# Altium PCB Motor_Driver.PcbDoc
Units mil, origin at the board's own origin, x right, y up, seen from the top; angles counter-clockwise.
Board outline 3935 x 2365 mil, 2 copper layers (Top Layer, Bottom Layer); 65 components, 50 nets, 262 pads, 52 vias.
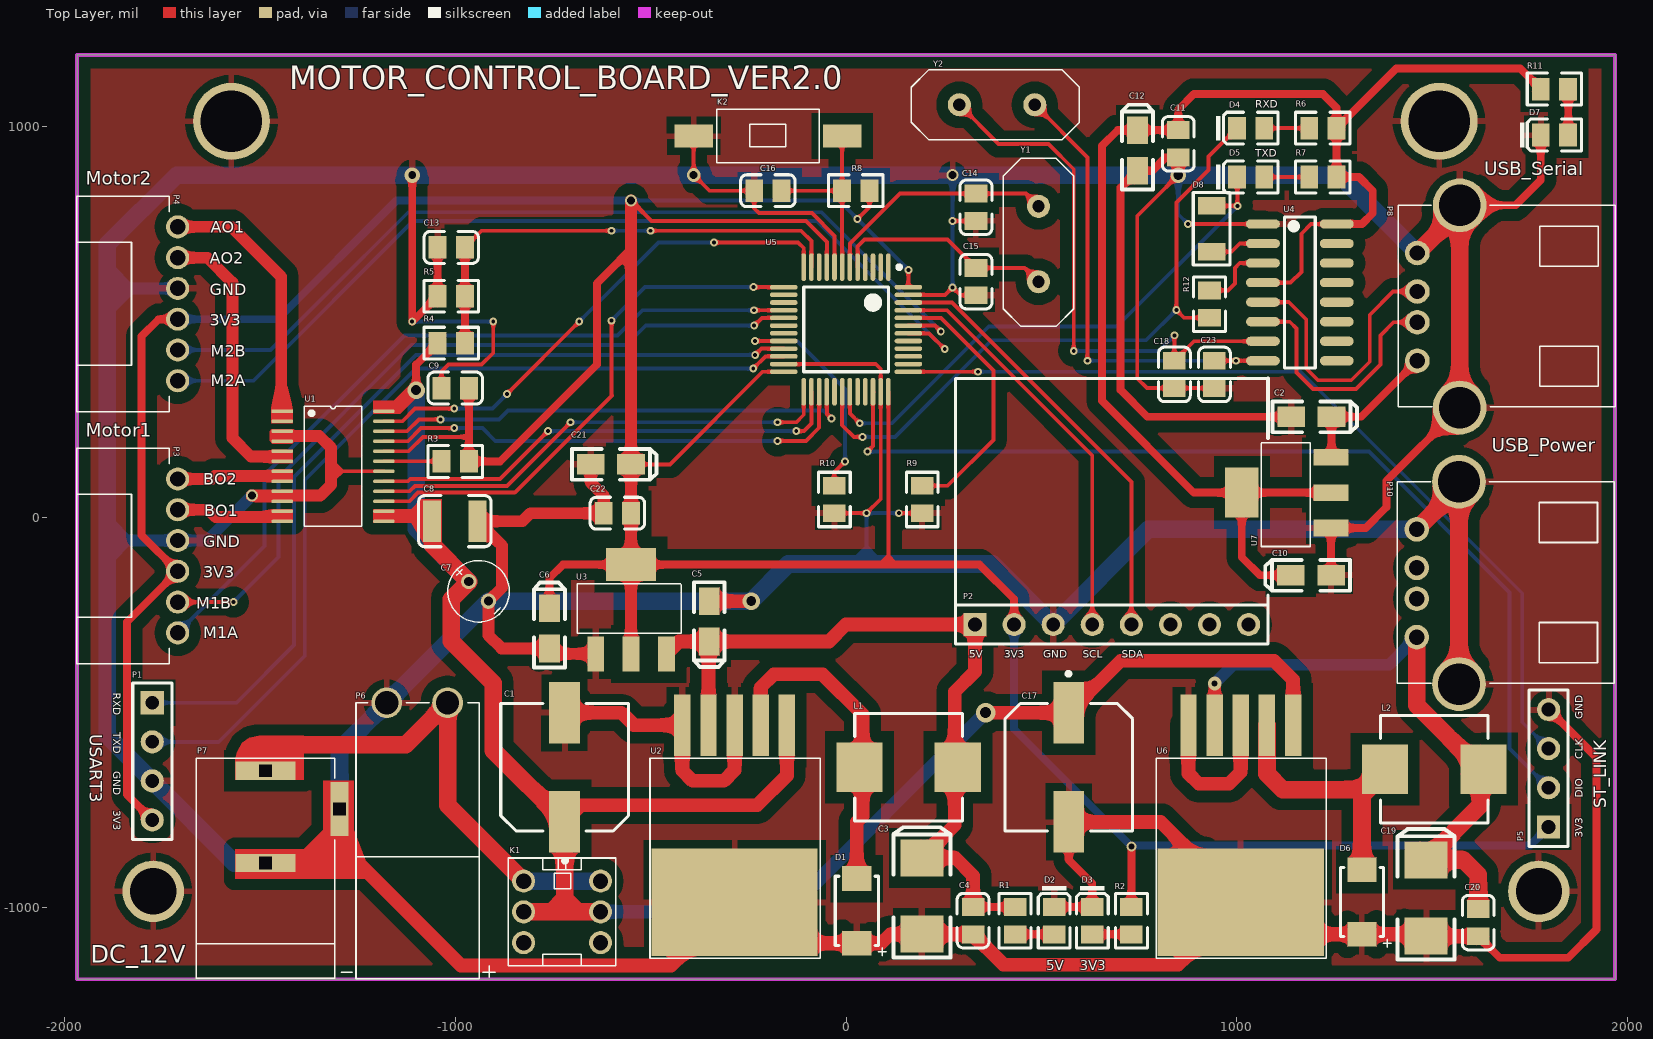
[diagram p0: Top Layer view]
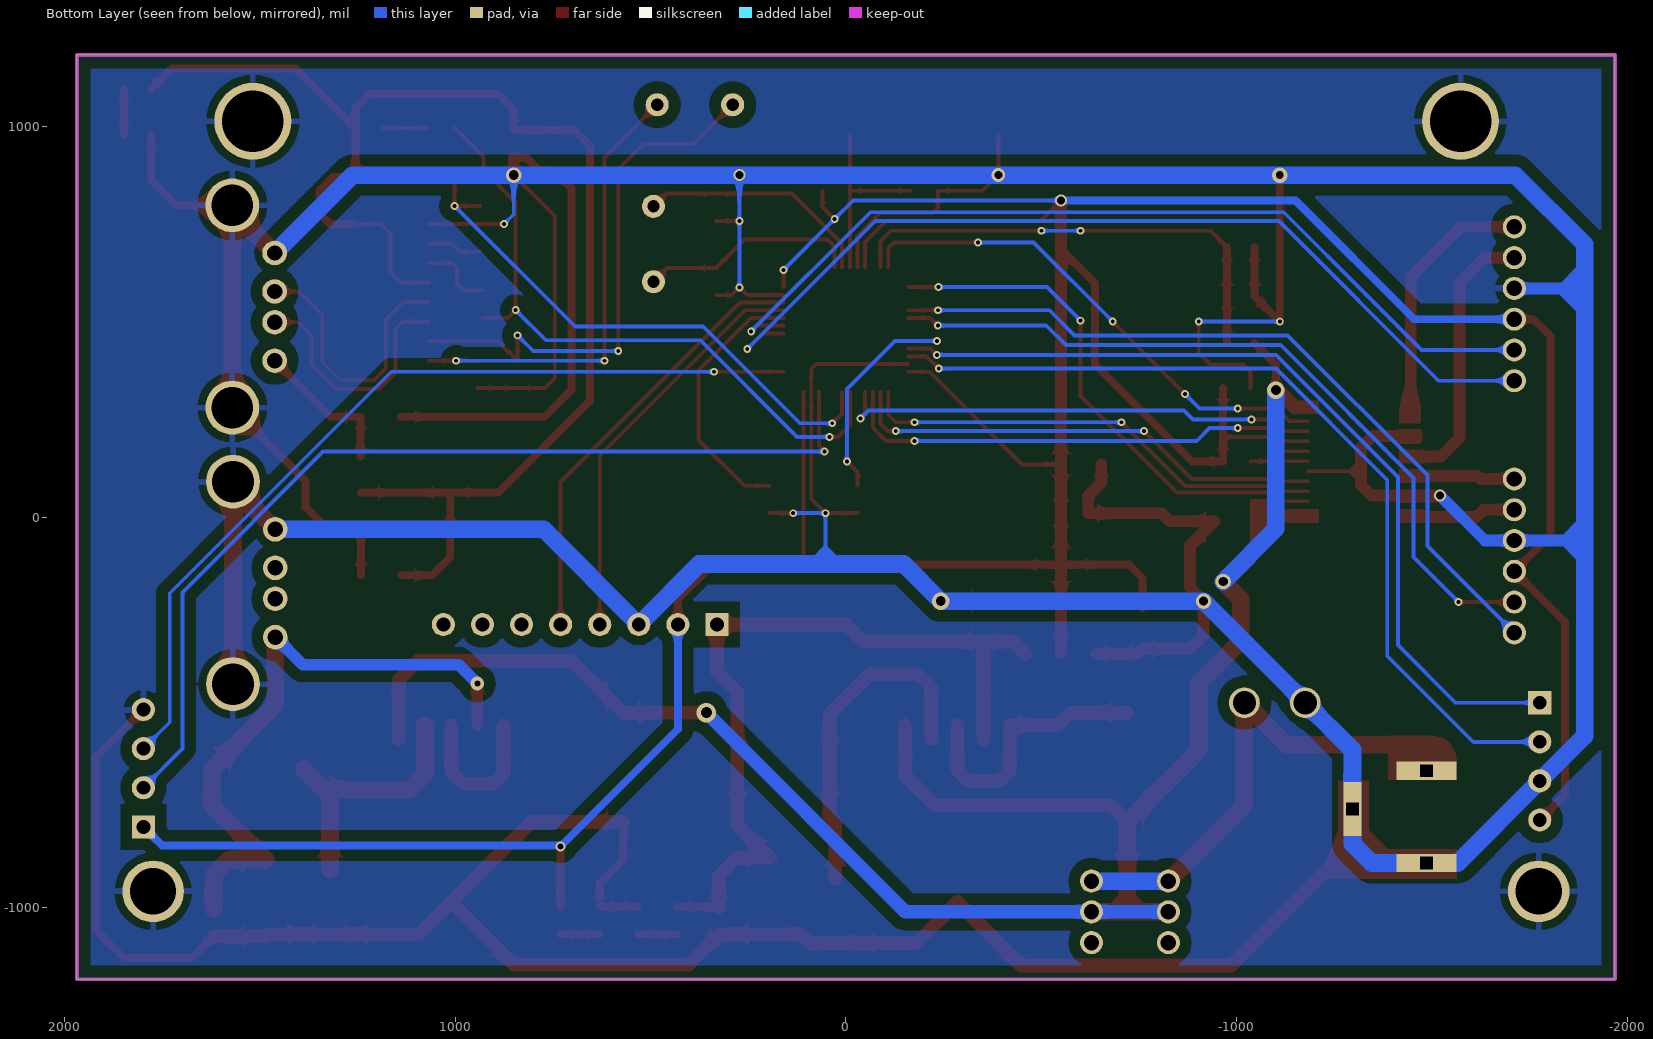
[diagram p1: Bottom Layer view, seen from below]
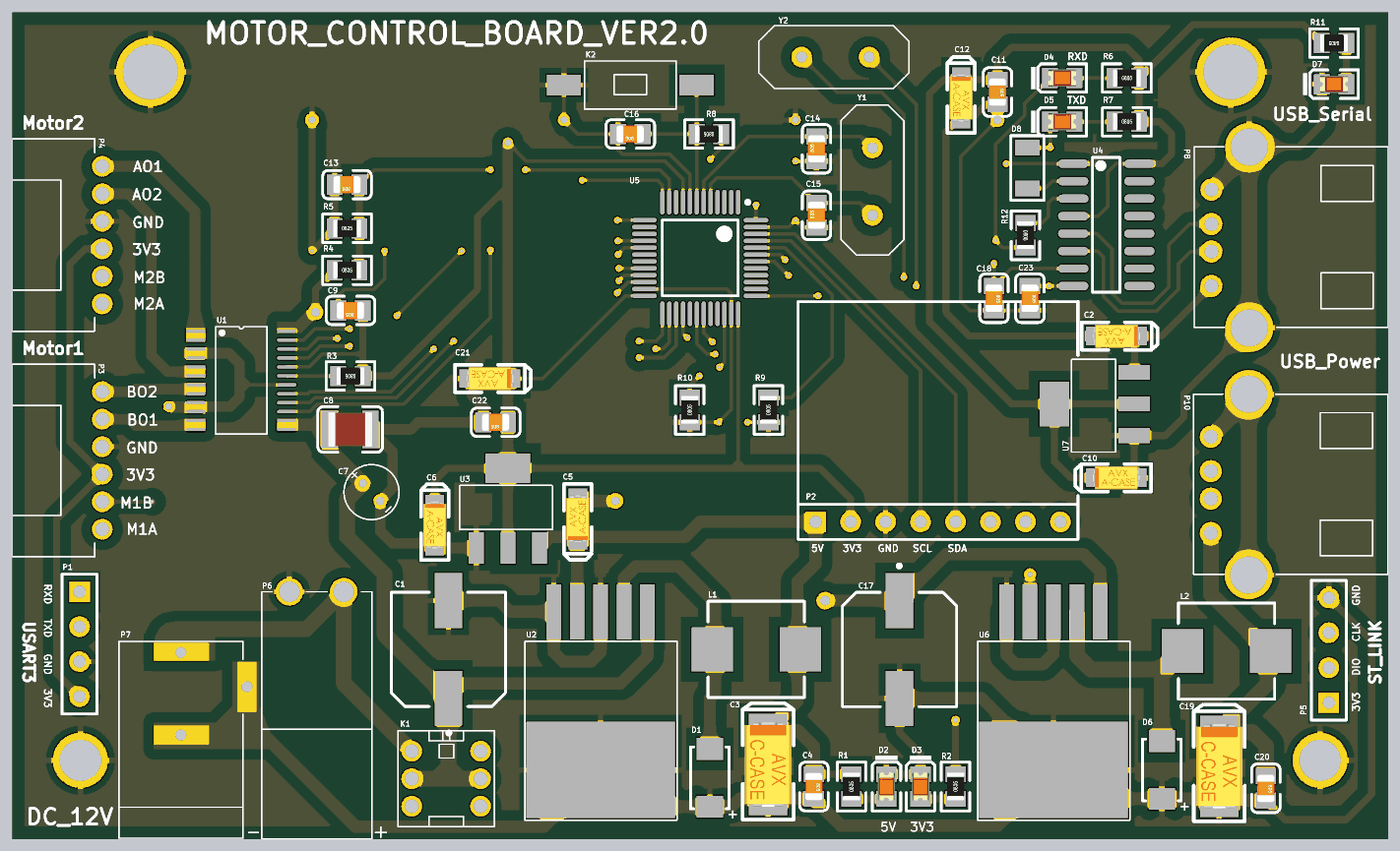
[diagram p2: 3D render of the assembled board from above, using the file's embedded part models]

## Layer stack, top to bottom
Top Solder: solder mask 0.4, Solder Resist, Dk 3.5
Top Layer: signal copper 1.4
Dielectric 1: dielectric 12.6, FR-4, Dk 4.8
Bottom Layer: signal copper 1.4
Bottom Solder: solder mask 0.4, Solder Resist, Dk 3.5

## Board outline
-1967.5,-1182.5 -1967.5,1182.5 1967.5,1182.5 1967.5,-1182.5

## Design rules (kind name [scope] priority, off if disabled: settings)
Clearance Polygon [InPolygon] p1: gap=30
Clearance [All] p2: gap=6
HoleSize [All] p1: absolutevalues=TRUE maxlimit=200 minlimit=1 maxpercent=80.000 minpercent=20.000
MinimumSolderMaskSliver [All] p1: minsoldermaskwidth=5
PolygonConnect [All] p1: connectstyle=Relief reliefconductorwidth=15 reliefentries=4 polygonreliefangle="90 Angle" airgapwidth=20
RoutingVias [All] p1: holewidth=10 width=20 viastyle="Through Hole" minholewidth=10 minwidth=20 maxholewidth=160 maxwidth=200
SilkToSilkClearance [All] p1: silktosilkclearance=2
SilkToSolderMaskClearance [IsPad] p1: minsilkscreentomaskgap=0 clearancetoexposedcopper=TRUE
SolderMaskExpansion [All] p1: expansion=4
Width [All] p1: maxlimit=50 minlimit=10 preferedwidth=30
26 further rules are at their usual default settings.

## Components (designator, comment, footprint, x,y, rotation, side; value= is the part's Value field where it differs from the comment)
C1 "470uF,20V" SMD8102_C -720,-640 r180 top
C2 "10uF" CAP_CASE_A_3216 1187.5,257.5 r180 top
C3 "100uF,10V" CAP_CASE_C_6032 195,-967.5 r270 top
C4 "104" 0805_C 325,-1032.5 r270 top
C5 "10uF" CAP_CASE_A_3216 -349.02,-263.62 r90 top
C6 "10uF" CAP_CASE_A_3216 -760,-287.5 r270 top
C7 "10uF" CAP_1.8R2 -940,-190 r135 top
C8 "0.1uF" 1210_C -1005,-12.5 r0 top
C9 "0.1uF" 0805_C -1000,330 r180 top
C10 "10uF" CAP_CASE_A_3216 1192.5,-150 r0 top
C11 "0.1uF" 0805_C 850,955.04 r270 top
C12 "10uF" CAP_CASE_A_3216 745,935 r270 top
C13 "0.1uF" 0805_C -1010.04,690 r180 top
C14 "20pF" 0805_C 332.5,792.5 r90 top
C15 "20pF" 0805_C 332.5,602.5 r90 top
C16 "0.1uF" 0805_C -200,835 r180 top
C17 "470uF,20V" SMD8102_C 570,-640.24 r0 top
C18 "22pF" 0805_C 840,365 r270 top
C19 "100uF,10V" CAP_CASE_C_6032 1485,-972.5 r270 top
C20 "104" 0805_C 1617.5,-1037.5 r270 top
C21 "10uF" CAP_CASE_A_3216 -604.53,135.98 r180 top
C22 "104" 0805_C -585,10 r180 top
C23 "22pF" 0805_C 942.5,365 r270 top
D1 "SS34" SMA 27.5,-1007.5 r270 top
D2 "LED_0603" LED_0805 532.5,-1032.5 r270 top
D3 "LED_0603" LED_0805 630,-1032.5 r270 top
D4 "LED_0603" LED_0805 1035,995 r0 top
D5 "LED_0603" LED_0805 1035,870 r0 top
D6 "SS34" SMA 1320,-985 r270 top
D7 "LED_0603" LED_0805 1812.5,977.5 r0 top
D8 "Diode_Switch" 1206_L 937.5,737.5 r90 top
K1 "Switch_Power" Switch_Key6 -825,-1088.74 r180 top
K2 "Reset" SWITCH_KEY2 -10,975 r180 top
L1 "330uH" SMD0707_L 160,-640 r0 top
L2 "330uH" SMD0707_L 1505,-645 r0 top
P1 "Bluetooth" Connect_4 -1775.67,-631.5 r270 top
P2 "IMU" HDR1X8 330,-275 r0 top
P3 "Motor1" PH2.0_P6 -1710,97.48 r270 top
P4 "Motor2" PH2.0_P6 -1710,742.48 r270 top
P5 "SWD" Connect_4 1798.17,-636 r90 top
P6 "Power" HT3.96_Power -1175,-475 r0 top
P7 "DC005" DC005 -1296.02,-747.2 r90 top
P8 "USB_Serial" USB_Pin6 1461.73,400.08 r90 top
P10 "USB_Power" USB_Pin6 1460,-307.17 r90 top
R1 "5.1k" 0805_R 432.5,-1032.5 r90 top
R2 "5.1k" 0805_R 730,-1032.5 r90 top
R3 "4.7K" 0805_R -1000,142.5 r180 top
R4 "10K 1%" 0805_R -1009.96,445 r0 top
R5 "1k 1%" 0805_R -1010.04,565 r0 top
R6 "500" 0805_R 1220,995 r0 top
R7 "500" 0805_R 1220,870 r0 top
R8 "4.7K" 0805_R 25,835 r180 top
R9 "4.7k" 0805_R 195,45 r90 top
R10 "4.7k" 0805_R -30,45 r90 top
R11 "5.1k" 0805_R 1812.5,1095 r180 top
R12 "300" 0805_R 930,545 r270 top
U1 "TB6612FNG" TB6612FNG -1315,125 r0 top locked
U2 "LM2596S" LM2596S -285,-567.68 r0 top
U3 "AMS1117_3.3V" LM1117 -550,-121.65 r0 top
U4 "CH340B" CH340B 1165,565 r270 top
U5 "STM32F103C8T6TR" STM-LQFP48_N 0,480 r270 top
U6 "LM2596S" LM2596S 1010,-567.68 r0 top
U7 "AMS1117_3.3V" LM1117 1012.5,62.5 r90 top
Y1 "8MHz" Xtal_Pin2 492.5,795 r270 top
Y2 "12MHz" Xtal_Pin2 290,1055 r0 top

## Footprints (in the part's own frame and the unit in brackets; to place one, negate y for a bottom-side part, rotate by r counter-clockwise, add the part's x,y. Pads: shape width x height; smd on the part's side, far side on the other; paste and mask are expansions set on the pad)
0805_C [mm]
  rect 1.16x1.47 smd: 1(-0.89,0) 2(0.89,0)
  silkscreen extent -1.77,-1.04 1.77,1.04, body extent -1,-0.62 1,0.63, height 0.77
0805_R [mm]
  rect 1.16x1.47 smd: 1(-0.89,0) 2(0.89,0)
  silkscreen extent -1.77,-1.04 1.77,1.03, body extent -1,-0.62 1,0.63, height 0.49
1206_L [mm]
  rect 1.13x1.8 smd: 1(-1.49,0.05) 2(1.49,0.05)
  silkscreen extent -2.36,-1.15 2.35,1.25
1210_C [mm]
  rect 1.16x2.72 smd: 1(-1.375,0.05) 2(1.575,0.05)
  silkscreen extent -2.26,-1.61 2.45,1.71, body extent -1.5,-1.2 1.7,1.3, height 1.3
CAP_1.8R2 [mm]
  round 1 hole 0.6: 1(0.9,0) 2(-0.9,0)
  silkscreen extent -2,-2 2,2
CAP_CASE_A_3216 [mm]
  rect 1.8x1.35 smd: 1(-1.385,0.025) 2(1.235,0.025)
  silkscreen extent -3.05,-0.98 2.46,1.03, body extent -1.77,-0.81 1.63,0.87, height 1.71
CAP_CASE_C_6032 [mm]
  rect 2.4x2.8 smd: 1(-2.43,-0.025) 2(2.53,-0.025)
  silkscreen extent -4.42,-1.88 4.06,1.82, body extent -3,-1.7 3.1,1.65, height 2.7
CH340B [mm]
  oval 0.6x2.2 smd: 1(-4.695,-2.5) 2(-3.425,-2.5) 3(-2.155,-2.5) 4(-0.885,-2.5) 5(0.385,-2.5) 6(1.655,-2.5) 7(2.925,-2.5) 8(4.195,-2.5) 9(4.195,2.3) 10(2.925,2.3) 11(1.655,2.3) 12(0.385,2.3) 13(-0.885,2.3) 14(-2.155,2.3) 15(-3.425,2.3) 16(-4.695,2.3)
  silkscreen extent -5.15,-1.1 4.65,0.9, body extent -5.35,-2.1 4.85,1.9, height 1.8
Connect_4 [mm]
  rect 1.5x1.5 hole 0.9: 1(-3.975,0.017)
  round 1.5 hole 0.9: 2(-1.435,0.017) 3(1.105,0.017) 4(3.645,0.017)
  silkscreen extent -5.25,-1.25 4.91,1.29
DC005 [mm]
  rect 1.2x3.9 hole 0.8 square: 1(2.5,4.8) 2(-3.5,4.8)
  rect 3.5x1.2 hole 0.8 square: 3(0,0)
  silkscreen extent -11,0.3 3.3,9.3, body extent -11,0.3 3.3,9.3, height 11
HDR1X8 [mm] "Connector; Header; 8 Position"
  rect 1.5x1.5 hole 0.9: 1(0,0)
  round 1.5 hole 0.9: 2(2.54,0) 3(5.08,0) 4(7.62,0) 5(10.16,0) 6(12.7,0) 7(15.24,0) 8(17.78,0)
  silkscreen extent -1.27,-1.27 19.05,1.27
HT3.96_Power [mm]
  round 2 hole 1.5: 1(0,0) 2(3.95,0)
  silkscreen extent -2.95,-17.95 7.05,0, body extent -2,-17.95 6,0, height 10
LED_0805 [mm]
  rect 1.16x1.47 smd: 1(0.89,0) 2(-0.89,0)
  silkscreen extent -2.24,-1.04 1.77,1.03, body extent -1.01,-0.62 1.01,0.62, height 1.1
LM1117 [mm]
  rect 1.09x2.29 smd: 1(-2.3,-5.8) 2(0,-5.8) 3(2.3,-5.8)
  rect 3.25x2.15 smd: 4(0,0)
  silkscreen extent -3.5,-4.45 3.25,-1.25, body extent -3.5,-4.45 3.25,-1.25, height 1.8
LM2596S [mm]
  rect 1.07x4 smd: 1(3.4,0.9) 2(1.7,0.9) 3(0,0.9) 4(-1.7,0.9) 5(-3.4,0.9)
  rect 10.8x6.99 smd: 6(0,-10.6)
  silkscreen extent -5.5,-14.25 5.55,-1.25, body extent -5.5,-13.8 5.5,-1.25, height 4.6
PH2.0_P6 [mm]
  round 1.5 hole 1: 1(0,0) 2(2,0) 3(4,0) 4(6,0) 5(8,0) 6(10,0)
  silkscreen extent -2,-6.55 12,-0.55, body extent -2.01,-6.55 12,-0.56, height 4.7
SMA [mm]
  rect 1.6x1.9 smd: 1(-2.1,0) 2(2.1,0)
  silkscreen extent -2.25,-1.4 2.92,1.91, body extent -2.25,-1.4 2.25,1.39, height 2.29
SMD0707_L [mm]
  rect 3x3.2 smd: 1(-3.2,0) 2(3.2,0)
  silkscreen extent -3.5,-3.5 3.5,3.5, body extent -3.5,-3.5 3.5,3.5, height 3.5
SMD8102_C [mm]
  rect 2x4 smd: 1(0,3.55) 2(0,-3.55)
  silkscreen extent -4.15,-4.15 4.15,6.2, body extent -4.15,-4.97 4.15,4.95, height 10.5
STM-LQFP48_N [mm] "QFP, 48-Leads, Body 7x7mm, Pitch 0.5mm, IPC Medium Density"
  oval 1.8x0.3 smd: 1(-4.05,2.75) 2(-4.05,2.25) 3(-4.05,1.75) 4(-4.05,1.25) 5(-4.05,0.75) 6(-4.05,0.25) 7(-4.05,-0.25) 8(-4.05,-0.75) 9(-4.05,-1.25) 10(-4.05,-1.75) 11(-4.05,-2.25) 12(-4.05,-2.75) 25(4.05,-2.75) 26(4.05,-2.25) 27(4.05,-1.75) 28(4.05,-1.25) 29(4.05,-0.75) 30(4.05,-0.25) 31(4.05,0.25) 32(4.05,0.75) 33(4.05,1.25) 34(4.05,1.75) 35(4.05,2.25) 36(4.05,2.75)
  oval 0.3x1.8 smd: 13(-2.75,-4.05) 14(-2.25,-4.05) 15(-1.75,-4.05) 16(-1.25,-4.05) 17(-0.75,-4.05) 18(-0.25,-4.05) 19(0.25,-4.05) 20(0.75,-4.05) 21(1.25,-4.05) 22(1.75,-4.05) 23(2.25,-4.05) 24(2.75,-4.05) 37(2.75,4.05) 38(2.25,4.05) 39(1.75,4.05) 40(1.25,4.05) 41(0.75,4.05) 42(0.25,4.05) 43(-0.25,4.05) 44(-0.75,4.05) 45(-1.25,4.05) 46(-1.75,4.05) 47(-2.25,4.05) 48(-2.75,4.05)
  silkscreen extent -4.17,-2.75 2.75,3.58, body extent -3.5,-3.5 3.5,3.5, height 1.6
SWITCH_KEY2 [mm]
  rect 2.5x1.5 smd: 1(0,0) 2(9.65,0)
  silkscreen extent 1.5,-1.75 8.15,1.75, body extent 1.5,-1.75 8.15,1.75, height 3
Switch_Key6 [mm]
  round 1.5 hole 1: 1(0,-4) 2(0,-2) 3(0,0) 4(-5,-4) 5(-5,-2) 6(-5,0)
  silkscreen extent -6,-5.5 1,1.5, body extent -6,-5.5 1,1.5, height 12
TB6612FNG [mm]
  rect 1.4x0.24 smd: 1(-3.234,3.702)
  oval 1.4x0.24 smd: 2(-3.234,3.052) 3(-3.234,2.402) 4(-3.234,1.752) 5(-3.234,1.102) 6(-3.234,0.452) 7(-3.234,-0.198) 8(-3.234,-0.848) 9(-3.234,-1.498) 10(-3.234,-2.148) 11(-3.234,-2.798) 12(-3.234,-3.448) 13(3.366,-3.448) 14(3.366,-2.798) 15(3.366,-2.148) 16(3.366,-1.498) 17(3.366,-0.848) 18(3.366,-0.198) 19(3.366,0.452) 20(3.366,1.102) 21(3.366,1.752) 22(3.366,2.402) 23(3.366,3.052) 24(3.366,3.702)
  silkscreen extent -1.8,-3.77 1.93,4.03, body extent -1.84,-3.79 1.97,4.08, height 0.04
USB_Pin6 [mm]
  round 1.6 hole 1: 1(0,0) 2(2.5,0) 3(4.5,0) 4(7,0)
  round 3.5 hole 2.7: 5(-3.05,-2.75) 6(10.1,-2.75)
  silkscreen extent -3,-12.85 10.1,1.25, body extent -3,-12.85 10.1,1.25, height 6
Xtal_Pin2 [mm]
  round 1.5 hole 0.8: 1(0,0) 2(4.9,0)
  silkscreen extent -3.12,-2.29 7.8,2.29, body extent -3.15,-2.3 7.8,2.3, height 3.5

## Part data
C1 C2 C3 C5 C6 C7 C10 C12 C17 C19 C21: library part Cap_Polar
C4 C8 C9 C11 C13 C14 C15 C16 C18 C20 C22 C23: library part Cap
D1 D6: library part Diode_Zener
D2 D3 D4 D5 D7: library part LED
K1: library part Switch_Key6
K2: library part Switch_Key2
L1 L2: library part Inductor
P1 P5: library part Connect_4
P2: library part "Header 8", "Header, 8-Pin"
P3 P4: library part PH2.0_P6
P6: library part HT3.96_Power
P8 P10: library part USB_Pin6
R1 R2 R3 R4 R5 R6 R7 R8 R9 R10 R11 R12: library part Res
U5: "ARM Cortex-M3 32-bit MCU, 64 KB Flash, 20 KB Internal RAM, 37 I/Os, 48-pin LQFP, -40 to 85 degC, Tape and Reel"
Y1 Y2: library part Xtal_Pin2

## Free pads (board coordinates)
  round 157.48 hole 118.11: 0(-1772.5,-957.5) 1(1772.5,-957.5)
  round 196.85 hole 157.48: 2(-1572.5,1012.5) 3(1517.5,1012.5)
  round 20 hole 10: 6(-500,732.5) 7(-600,732.5) 8(-1110,500.08)

## Via types
v1: diameter 20, hole 10, Top Layer to Bottom Layer, 40 vias
v2: diameter 30, hole 20, Top Layer to Bottom Layer, 3 vias
v3: diameter 45, hole 25, Top Layer to Bottom Layer, 2 vias
v4: diameter 35, hole 15, Top Layer to Bottom Layer, 1 vias
v5: diameter 40, hole 20, Top Layer to Bottom Layer, 1 vias
v6: diameter 35, hole 20, Top Layer to Bottom Layer, 1 vias
v7: diameter 50, hole 28, Top Layer to Bottom Layer, 1 vias
v8: diameter 20, hole 10, Top Layer to Bottom Layer, tented both sides, 1 vias
v9: diameter 25, hole 15, Top Layer to Bottom Layer, 1 vias
v10: diameter 40, hole 25, Top Layer to Bottom Layer, 1 vias

## Nets (pads, with @x,y where several pads share a name; then routed paths per layer and width w, separated by ;. In a path a pad name is that pad's centre, name@x,y a point inside that pad or via, vN(x,y) a via of type N, cw(c..) or ccw(c..) an arc to the next point about the centre after c; other vN are vias at no path point)
5V_IPC: C19.1 C20.1 L2.2 P10.1 U6.4 | length 1604.2
  Top Layer w30: U6.4 v4(943.07,-425.57)
  Top Layer w45: P10.1 1460,-481.89 1623.11,-645 1623.11,-737.74 C19.1 1579.33,-876.83 1617.5,-915 C20.1
  Bottom Layer w30: v4(943.07,-425.57) 991.14,-377.5 1389.67,-377.5 P10.1
AIN1: U1.21 U5.27 | length 1246.8
  Top Layer w10: U1.21 -1121.02,193.98 -1087.5,227.5 v1(-1002.5,227.5) ; v1(-175,195) -102.5,195 -68.9,228.6 U5.27
  Bottom Layer w10: v1(-1002.5,227.5) -930,227.5 -897.5,195 v1(-175,195)
AIN2: U1.22 U5.28 | length 1248.1
  Top Layer w10: U1.22 -1122.93,219.57 -1092.5,250 v1(-1037.5,250) ; U5.28 -49.21,264.21 v1(-37.5,252.5)
  Bottom Layer w10: v1(-1037.5,250) -887.5,250 -865,272.5 -57.5,272.5 v1(-37.5,252.5)
AO1: P4.1 U1.1 U1.2 | length 604.9
  Top Layer w10: P4.1 P4.1@-1710,744.53
  Top Layer w30: P4.1 -1572.48,742.48 -1445,615 -1445,330
AO2: P4.2 U1.5 U1.6 | length 713.6
  Top Layer w30: P4.2 -1633.74,663.74 -1570,600 -1570,202.5 -1522.5,155 -1440,155
BIN1: U1.17 U5.26 | length 1236.5
  Top Layer w10: U1.17 -1120.89,91.61 -1115,97.5 -885,97.5 v1(-762.5,220) ; v1(-127.5,220) -107.5,220 -88.58,238.92 U5.26
  Bottom Layer w10: v1(-762.5,220) v1(-127.5,220)
BIN2: U1.16 U5.25 | length 1214.1
  Top Layer w10: U1.16 -1116.48,66.02 -1102.5,80 -867.5,80 v1(-705,242.5) ; v1(-175,242.5) -127.5,242.5 -108.27,261.73 U5.25
  Bottom Layer w10: v1(-705,242.5) v1(-175,242.5)
BO1: P3.2 U1.11 U1.12 | length 217.8
  Top Layer w30: P3.2 -1631.24,18.74 -1612.5,0 -1500,0
BO2: P3.1 U1.7 U1.8 | length 213.1
  Top Layer w30: P3.1 -1622.52,97.48 -1615,105 -1500,105
BOOT0: R9.2 U5.44 | length 682.4
  Top Layer w10: U5.44 242.97,509.53 377.5,375 377.5,197.5 260.04,80.04 R9.2
BOOT1: R10.2 U5.20 | length 613.8
  Top Layer w10: v1(-232.97,450.47) U5.20 ; R10.2 -30,115 v1(-2.5,142.5)
  Bottom Layer w10: v1(-232.97,450.47) -125.47,450.47 -2.5,327.5 v1(-2.5,142.5)
D+: P8.3 U4.5 | length 715.6
  Top Layer w10: U4.5 1132.66,549.84 1177.5,505 1177.5,380 1207.5,350 1292.5,350 1340,397.5 1340,517.5 1399.74,577.24 P8.3
D-: P8.2 U4.6 | length 647.2
  Top Layer w10: U4.6 1135.16,499.84 1152.5,482.5 1152.5,370 1195,327.5 1305,327.5 1367.5,390 1367.5,465 1401,498.5 P8.2
GND: C1.2 C2.2 C3.2 C4.2 C5.2 C6.2 C7.2 C8.2 C9.2 C10.2 C11.2 C12.2 C13.2 C14.1 C15.1 C16.2 C17.2 C18.2 C19.2 C20.2 C21.2 C22.2 C23.2 D1.2 D2.2 D3.2 D6.2 D7.2 K2.2 P1.3 P2.3 P3.3 P4.3 P5.4 P6.1 P7.2 P7.3 P8.4 P8.5 P8.6 P10.4 P10.5 P10.6 pad.0 pad.1 pad.2 pad.3 pad.8 R5.1 R9.1 R10.1 U1.3 U1.4 U1.9 U1.10 U1.18 U2.3 U2.5 U2.6 U3.1 U4.1 U5.8 U5.23 U5.35 U5.47 U6.3 U6.5 U6.6 U7.1 | length 25505.9
  Top Layer w10: -1317.5,117.5 -1317.2,117.2 U1.18 ; C9.2 -1035.04,372.46 -1017.5,390 -932.5,390 -902.58,419.92 v1(-902.58,500.08) ; K2.2 v6(-389.92,875.08) -349.84,835 C16.2 -235.04,790.04 -222.5,777.5 -87.5,777.5 -29.53,719.53 U5.8 ; U5.23 76.08,391.42 88.9,378.6 88.9,46.4 v1(52.5,10) ; R10.1 v1(52.5,10) ; v1(135,10) R9.1 ; U5.47 253.58,568.58 v1(272.5,587.5) 292.54,567.46 C15.1 ; v1(272.5,757.5) C14.1 C14.1 ; v10(850,875) 745,770 745,355 770.04,329.96 C18.2 C23.2 ; v1(874.84,749.84) U4.1
  Top Layer w20: v5(-1110,875) pad.8 R5.1 C13.2 ; D2.2 D3.2 630,-937.5 570,-877.5 C17.2 ; C11.2 817.5,920 783.88,886.38 C12.2 702.5,842.89 702.5,325 770.98,256.52 C2.2 ; C10.2@1240.85,-148.74 U7.1 1329.45,-28.05 1382.5,25 1382.5,92.5 P8.5 ; P8.6 1712.72,797.72 1777.46,862.46 D7.2 ; C20.2 1672.46,-1127.5 1847.5,-1127.5 1920,-1055 1920,-615 P5.4
  Top Layer w30: v2(-1520,55) -1345,55 -1317.5,82.5 -1317.5,117.5 -1317.5,177.5 -1347.5,207.5 -1460,207.5 ; C21.2 -653.15,88.15 -620.04,55.04 C22.2 -807.5,10 -828.03,-10.53 C8.2 -880,-73.52 -880,-180.11 C7.2 -914.95,-302.56 -881.38,-336.12 C6.2 -745.14,-350 U3.1 ; v10(850,875) C11.2
  Top Layer w35: P7.2 -1247.5,-885 -985,-1147.5 -447.5,-1147.5 U2.6 -179.82,-1090.18 D1.2 89.82,-1090.18 112.89,-1067.11 C3.2 C4.2@324.57,-1067.11 ; C1.2 -574.76,-500.24 -542.76,-532.24 U2.5 -418.86,-648.64 -392.5,-675 -312.5,-675 -285,-647.5 U2.3 ; C5.2 v3(-242.5,-215) ; C4.2 402.46,-1145 850,-1145 U6.6 ; C17.2 805,-780 U6.6 ; U6.5 876.14,-656.14 902.5,-682.5 980,-682.5 1010,-652.5 U6.3 ; C20.2 1617.07,-1072.11 C19.2 1479.41,-1067.5 1092.5,-1067.5 U6.6
  Top Layer w45: P10.4 1568.27,76.69 P10.5 ; P8.4 P8.6@1570,783.94 ; P8.5 P8.6@1570,783.94 ; P8.6 P8.6@1570,783.94
  Bottom Layer w10: pad.8 v1(-902.58,500.08) ; 55,-120 52.5,-117.5 v1(52.5,10) v1(135,10) ; v1(272.5,587.5) v1(272.5,757.5) v2(272.5,875) ; v10(850,875) 850,774.68 v1(874.84,749.84)
  Bottom Layer w30: -1887.5,-60 P3.3 -1635,-60 v2(-1520,55) ; -1887.5,585 P4.3
  Bottom Layer w45: P10.4 773.43,-31.57 P2.3 375,-120 55,-120 -147.5,-120 v3(-242.5,-215) -915,-215 P6.1 -1296.02,-596.02 P7.3 -1296.02,-836.02 -1345,-885 P7.2 -1565,-885 P1.3 -1890,-560 -1890,697.5 -1712.5,875 v5(-1110,875) v2(272.5,875) v10(850,875) 1262.4,875 P8.4
M1A: P3.6 U5.16 | length 1998.6
  Top Layer w10: v1(-235.79,529.21) U5.16
  Bottom Layer w10: P3.6 -1487.5,-73.72 -1487.5,107.5 -1130,465 -585,465 -520.79,529.21 v1(-235.79,529.21)
M1B: P3.5 U5.17 | length 1970.3
  Top Layer w10: P3.5 v8(-1567.52,-217.48) ; v1(-235,490) -215.47,509.53 U5.17
  Bottom Layer w10: v8(-1567.52,-217.48) -1452.5,-102.46 -1452.5,100 -1112.5,440 -562.5,440 -512.5,490 v1(-235,490)
M2A: P4.6 U5.42 | length 2377.1
  Top Layer w10: U5.42 212.34,470.16 v1(252.5,430)
  Bottom Layer w10: P4.6 -1516.22,348.78 -1107.5,757.5 -75,757.5 v1(252.5,430)
M2B: P4.5 U5.43 | length 2314
  Top Layer w10: U5.43 227.66,489.84 v1(242.5,475)
  Bottom Layer w10: P4.5 -1472.48,427.52 -1342.42,557.58 -1120,780 -62.5,780 v1(242.5,475)
NetC14_2: C14.2 U5.6 Y1.1 | length 609.4
  Top Layer w10: U5.6 9.84,699.84 137.54,827.54 C14.2 459.96,827.54 Y1.1
NetC15_2: C15.2 U5.5 Y1.2 | length 567.7
  Top Layer w10: U5.5 29.53,692.03 47.5,710 260.04,710 C15.2 457.05,637.54 Y1.2
NetC16_1: C16.1 K2.1 R8.2 U5.7 | length 490.6
  Top Layer w10: C16.1 R8.2 ; K2.1 K2.1 R8.2 ; U5.7 -9.84,834.8 R8.2
NetC18_1: C18.1 U4.7 Y2.1 | length 1412.1
  Top Layer w10: Y2.1 390,955 517.5,955 582.5,890 v1(582.5,425) ; v1(840,465) C18.1 889.8,449.84 U4.7
  Bottom Layer w10: v1(582.5,425) 800,425 v1(840,465)
NetC23_1: C23.1 U4.8 Y2.2 | length 1214.6
  Top Layer w10: Y2.2 617.46,920.45 v1(617.46,400.04) ; C23.1 v1(997.46,400.04) U4.8@1066.38,400.04
  Bottom Layer w10: v1(617.46,400.04) v1(997.46,400.04)
NetD1_1: D1.1 L1.1 U2.2 | length 874.4
  Top Layer w35: U2.2@-218.07,-567.68 U2.2 -218.07,-435.57 -185,-402.5 -60,-402.5 41.89,-504.39 41.89,-765.61 27.5,-780 D1.1
NetD2_1: D2.1 R1.1 | length 100
  Top Layer w20: R1.1 D2.1
NetD3_1: D3.1 R2.1 | length 100
  Top Layer w20: D3.1 R2.1
NetD4_1: D4.1 R6.1 | length 114.9
  Top Layer w10: D4.1 R6.1
NetD5_1: D5.1 R7.1 | length 114.9
  Top Layer w10: D5.1 R7.1
NetD6_1: D6.1 L2.1 U6.2 | length 684
  Top Layer w45: U6.2 1076.93,-656.93 1117.5,-697.5 L2.1@1334.39,-697.5 ; D6.1 1320,-711.89 L2.1@1334.39,-697.5 ; L2.1@1386.89,-645 L2.1@1334.39,-697.5
NetD7_1: D7.1 R11.1 | length 117.5
  Top Layer w20: D7.1 R11.1
NetD8_1: D8.1 U4.2 | length 139.7
  Top Layer w10: D8.1 986.34,678.84 1007.34,699.84 U4.2
NetR12_1: R12.1 U4.3 | length 188.9
  Top Layer w10: R12.1 977.54,580.04 995,597.5 995,637.5 1007.34,649.84 U4.3
PWMA: U1.23 U5.12 | length 1318.4
  Top Layer w10: U1.23 -1134.84,245.16 -1102.5,277.5 v1(-1002.5,277.5) ; v1(-867.5,315) v1(-682.5,500) ; v1(-337.5,702.5) -122.5,702.5 -108.27,688.27 U5.12
  Bottom Layer w10: v1(-1002.5,277.5) -905,277.5 v1(-867.5,315) ; v1(-682.5,500) -480,702.5 v1(-337.5,702.5)
PWMB: U1.15 U5.13 | length 1363.4
  Top Layer w10: U1.15 -1117.07,40.43 -1095,62.5 -847.5,62.5 -599.23,310.77 -600,311.54 v1(-600,502.5) ; v1(-236.73,588.27) U5.13
  Bottom Layer w10: v1(-600,502.5) -514.23,588.27 v1(-236.73,588.27)
RXD1: D4.2 R12.2 U5.30 | length 1710
  Top Layer w10: U5.30 -9.84,234.84 20,205 v1(42.5,205) ; R12.2 865.04,509.96 v1(845,530) 845,805 927.5,887.5 927.5,922.54 D4.2
  Bottom Layer w10: v1(42.5,205) 125,205 372.5,452.5 767.5,452.5 v1(845,530)
RXD3: P1.1 U5.21 | length 2242.6
  Top Layer w10: v1(-232.5,415) -216.71,430.79 U5.21
  Bottom Layer w10: P1.1 -1560,-475 -1412.5,-327.5 -1412.5,102.5 -1100,415 v1(-232.5,415)
SCL: P2.4 U5.45 | length 1057
  Top Layer w10: U5.45 258.29,529.21 630,157.5 P2.4
SDA: P2.5 U5.46 | length 1125.7
  Top Layer w10: U5.46 271.1,548.9 730,90 730,-125.04 ; P2.5 P2.5 730.04,-125
STBY: R3.2 U1.19 | length 147.6
  Top Layer w10: U1.19 -1035.33,142.8 R3.2
SWCLK: P5.3 U5.37 | length 2230.8
  Top Layer w10: U5.37 v1(337.5,371.73)
  Bottom Layer w10: v1(337.5,371.73) 1163.27,371.73 1730,-195 1730,-525 P5.3
SWDIO: P5.2 U5.34 | length 2493.4
  Top Layer w10: v1(55,167.5) 68.9,181.4 U5.34 U5.34@70,319.45
  Bottom Layer w10: v1(55,167.5) 1337.5,167.5 1697.5,-192.5 1697.5,-592.5 P5.2
TXD1: D5.2 D8.2 U5.31 | length 1425.8
  Top Layer w10: U5.31 9.84,265.16 v1(35,240) ; D8.2 v1(1001.16,796.16) D5.2@1001.16,868.8
  Bottom Layer w10: v1(35,240) 117.5,240 365,487.5 692.5,487.5 v1(1001.16,796.16)
TXD3: P1.2 U5.22 | length 2287.6
  Top Layer w10: v1(-237.5,380) -206.4,411.1 U5.22
  Bottom Layer w10: P1.2 -1605,-575 -1385,-355 -1385,95 -1100,380 v1(-237.5,380)
USB_3.3V: C10.1 C11.1 C12.1 R6.2 R7.2 R11.2 U4.4 U4.16 U7.2 U7.4 | length 3706.5
  Top Layer w10: U4.4 1137.34,599.84 1165,627.5 1165,725 1189.84,749.84 U4.16
  Top Layer w20: C10.1 1059.02,-149.02 1012.5,-102.5 U7.4 ; U7.2 U7.4 ; U4.16 1319.84,749.84 1347.5,777.5 1347.5,835 1312.5,870 R7.2 R6.2 ; R11.2 1724.96,1147.5 1407.54,1147.5 R6.2 ; U7.4 890,62.5 655,297.5 655,950 695.08,990.08 C11.1 850,1042.5 890,1082.5 1220,1082.5 1255.04,1047.46 R6.2
USB_5V: C2.1 P8.1 U7.3 | length 381.5
  Top Layer w20: U7.3@1242.03,154.23 C2.1 1318.17,256.52 P8.1
VCC_3.3V: C6.1 C9.1 C21.1 C22.1 P1.4 P2.2 P3.4 P4.4 P5.1 R2.2 R3.1 R8.1 U1.20 U3.2 U3.4 U5.9 U5.24 U5.36 U5.48 | length 10880.1
  Top Layer w10: U1.20 -1119.11,168.39 -1082.5,205 -966.21,205 ; C21.1 -450,135 -213.27,371.73 U5.24 ; v2(-550,810) -497.5,757.5 -102.5,757.5 -49.21,704.21 U5.9 ; v1(28.9,762.5) 60.04,793.64 R8.1 ; 108.27,-120.89 U5.36 ; U5.48 v1(159.45,631.95)
  Top Layer w20: P1.4 -1840,-710 -1840,-268.74 P3.4 -1802.5,-46.24 -1802.5,462.5 -1758.74,506.26 P4.4 ; C9.1 -966.21,328.75 -964.96,327.5 R3.1 -885,142.5 -637.5,390 -637.5,597.5 -550,685 ; C6.1 -759.02,-156.52 -724.15,-121.65 U3.4 341.65,-121.65 430,-210 P2.2 ; R2.2 v9(730,-842.5)
  Top Layer w30: P3.4 P3.4@-1703.74,-145 ; P4.4 P4.4@-1703.74,500 ; U3.2 U3.4 C22.1 C22.1 C21.1 C21.1 -550,685 v2(-550,810)
  Bottom Layer w10: v2(-550,810) -18.6,810 v1(28.9,762.5) v1(159.45,631.95)
  Bottom Layer w20: P4.4 -1453.74,506.26 -1150,810 v2(-550,810) ; P2.2 430,-542.5 v9(730,-842.5) 732.5,-840 1750,-840 P5.1
VCC_5V: C3.1 C4.1 C5.1 L1.2 P2.1 R1.2 U2.4 U3.3 | length 2061.4
  Top Layer w20: C4.1 R1.2
  Top Layer w35: U3.3 -427.6,-318.15 C5.1 ; U2.4@-351.93,-567.68 -351.93,-320.08 C5.1 ; C4.1 325,-917.5 279.33,-871.83 C3.1 278.11,-787.74 278.11,-640 278.11,-446.89 330,-395 P2.1 -0.59,-275 -43.74,-318.15 C5.1
VCC_12V: C1.1 C7.1 C8.1 C17.1 K1.2 K1.5 R4.1 U1.13 U1.14 U1.24 U2.1 U6.1 | length 5337.6
  Top Layer w10: U1.24 -1154.25,270.75 v3(-1100,325)
  Top Layer w20: v3(-1100,325) -1100,390 R4.1
  Top Layer w35: -760,-1010 -720,-970 ; C1.1 -677.74,-737.5 -227.5,-737.5 -151.14,-661.14 U2.1 ; v7(357.03,-500.47) C17.1 702.97,-367.5 1095,-367.5 1143.86,-416.36 U6.1 U6.1@1143.86,-567.68
  Top Layer w45: C8.1 -1059.13,-70.87 C7.1 -1010,-209.89 -1010,-317.5 -902.5,-425 -902.5,-597.26 C1.1 -720,-970 ; K1.2 -760,-1010 K1.5
  Bottom Layer w35: K1.2 K1.5 -152.5,-1010 v7(357.03,-500.47)
  Bottom Layer w45: v3(-1100,325) -1100,-30 C7.1
VCC_ADC: C13.1 pad.6 pad.7 R4.2 R5.2 U5.11 | length 1226.6
  Top Layer w10: R4.2@-975,445.08 R4.2 ; C13.1 -932.5,732.5 pad.7 ; pad.6 -115,732.5 -88.58,706.08 U5.11
  Top Layer w20: R4.2@-975,445.08 R5.2 C13.1
  Bottom Layer w10: pad.7 pad.6
VIN_12V: K1.1 K1.4 P6.2 P7.1 | length 1295.3
  Top Layer w45: P7.1 -1485,-607.5 -1460,-582.5 -1126.99,-582.5 P6.2 -1019.49,-736.77 K1.1
  Bottom Layer w45: K1.1 K1.4
pads on no net: K1.3 K1.6 P2.6 P2.7 P2.8 P10.2 P10.3 U4.9 U4.10 U4.11 U4.12 U4.13 U4.14 U4.15 U5.1 U5.2 U5.3 U5.4 U5.10 U5.14 U5.15 U5.18 U5.19 U5.29 U5.32 U5.33 U5.38 U5.39 U5.40 U5.41

## Polygon pours and split planes (outlines as drawn)
GND on Bottom Layer "Bottom Layer-GND" (solid, remove dead copper, pour order 0): -1967.5,1182.5 1967.5,1182.5 1967.5,-1182.5 -1967.5,-1182.5 -1967.5,1182.5
GND on Top Layer "Top Layer-GND" (solid, remove dead copper, pour order 2): -1967.5,1182.5 1967.5,1182.5 1967.5,-1182.5 -1967.5,-1182.5 -1967.5,1182.5

## Keep-outs
Keep-Out Layer:
  the board outline again, w10

## Other copper
Top Layer:
  region net GND: -1302.5,137.5 -1287.5,122.5 -1287.5,112.5 -1302.5,97.5 -1330,97.5 -1330,137.5
  region net GND: -1475,220 -1475,195 -1467.5,187.5 -1417.5,187.5 -1407.5,197.5 -1407.5,220 -1412.5,225 -1470,225
  region net VCC_3.3V: 105,-87.5 105,-95 87.5,-112.5 87.5,-125 142.5,-125 142.5,-112.5 127.5,-112.5 112.5,-97.5 112.5,-87.5
  region net VCC_12V: -1210,265 -1140,265 -1085,320 -1085,340 -1092.5,347.5 -1107.5,347.5 -1157.5,297.5 -1210,297.5
  region net VCC_12V: -1210,20 -1210,-15 -1152.5,-15 -1112.5,-15 -1082.5,-65 -1035,-65 -1035,45 -1087.5,45 -1112.5,20
  region net GND: -1415,70 -1527.5,70 -1535,62.5 -1535,47.5 -1525,40 -1512.5,37.5 -1415,35
  region net AO1: -1460,330 -1467.5,292.5 -1470,280 -1470,240 -1415,240 -1415,275 -1420,295 -1430,335 -1460,335
  region net AO2: -1527.5,170 -1502.5,170 -1485,170 -1470,172.5 -1415,172.5 -1415,137.5 -1477.5,137.5 -1505,140 -1522.5,140 -1530,145 -1537.5,150 -1535,160
  region net BO2: -1415,122.5 -1415,87.5 -1467.5,87.5 -1500,90 -1500,120 -1497.5,120 -1467.5,122.5
  region net BO1: -1415,20 -1415,-15 -1497.5,-15 -1500,-12.5 -1500,15 -1472.5,20
  region net VCC_12V: -737.5,-962.5 -767.5,-992.5 -847.5,-992.5 -847.5,-1027.5 -610,-1027.5 -610,-992.5 -672.5,-992.5 -702.5,-962.5
  region net VCC_12V: -1210,277.5 -1210,265 -1150,265 -1085,320 -1085,332.5 -1095,340 -1105,340 -1160,277.5
  region net VCC_3.3V: -987.5,210 -980,212.5 -970,215 -970,195 -980,197.5 -987.5,200
  region net GND: -1562.5,-850 -1387.5,-850 -1337.5,-800 -1337.5,-675 -1297.5,-675 -1260,-675 -1260,-800 -1227.5,-882.5 -1232.5,-925 -1325,-925 -1562.5,-925
  region net VIN_12V: -1562.5,-672.5 -1562.5,-620 -1557.5,-600 -1545,-577.5 -1527.5,-565 -1502.5,-560 -1387.5,-560 -1387.5,-672.5
Bottom Layer:
  region net GND: 47.5,-75 25,-97.5 25,-115 82.5,-115 82.5,-97.5 80,-97.5 57.5,-75
  region net GND: -1867.5,637.5 -1830,600 -1825,600 -1825,570 -1867.5,527.5 -1910,527.5 -1910,637.5
  region net GND: -1867.5,-12.5 -1835,-45 -1835,-75 -1867.5,-107.5 -1905,-107.5 -1905,-12.5

## Silkscreen, mask and mechanical layers (free items; w line width, h text height)
Top Overlay:
  lines w7.87: 280,-225 280,355 940,355 1080,355
  lines w8: 1080,-225 1080,-200
  lines w10: 1080,202.5 1080,355
  text "MOTOR_CONTROL_BOARD_VER2.0" at -1425,1095 h60
  text "RXD" at 1047.5,1047.5 h19.68
  text "TXD" at 1047.5,922.5 h19.68
  text "USB_Serial" at 1632.5,875 h35
  text "Motor2" at -1945,850 h35
  text "AO1" at -1625,727.5 h30
  text "AO2" at -1627.5,647.5 h30
  text "GND" at -1627.5,567.5 h30
  text "3V3" at -1627.5,490 h30
  text "M2B" at -1625,410 h30
  text "M2A" at -1625,335 h30
  text "Motor1" at -1945,205 h35
  text "USB_Power" at 1652.5,167.5 h35
  text "BO2" at -1645,82.5 h30
  text "BO1" at -1642.5,2.5 h30
  text "GND" at -1645,-77.5 h30
  text "3V3" at -1645,-155 h30
  text "M1B" at -1662.5,-235 h30
  text "M1A" at -1645,-310 h30
  text "5V" at 315,-360 h19.68
  text "3V3" at 405,-360 h19.68
  text "GND" at 505,-360 h19.68
  text "SCL" at 605,-360 h19.68
  text "SDA" at 705,-360 h19.68
  text "RXD" at -1875,-450 h19.68 r270
  text "GND" at 1885,-517.5 h19.68 r90
  text "TXD" at -1875,-550 h19.68 r270
  text "USART3" at -1935,-555 h31.5 r270
  text "CLK" at 1885,-620 h19.68 r90
  text "GND" at -1875,-650 h19.68 r270
  text "DIO" at 1885,-717.5 h19.68 r90
  text "ST_LINK" at 1945,-745 h31.5 r90
  text "3V3" at -1875,-750 h19.68 r270
  text "3V3" at 1885,-820 h19.68 r90
  text "DC_12V" at -1932.5,-1140 h45
  text "5V" at 512.5,-1160 h25
  text "3V3" at 597.5,-1160 h25
Top Solder:
  region: -1215,17.5 -1215,-15 -1210,-20 -1157.5,-20 -1150,-12.5 -1150,17.5 -1155,22.5 -1210,22.5
  region: -1475,17.5 -1475,-12.5 -1467.5,-20 -1417.5,-20 -1410,-12.5 -1410,17.5 -1415,22.5 -1470,22.5
  region: -1475,67.5 -1475,37.5 -1470,32.5 -1415,32.5 -1410,37.5 -1410,67.5 -1417.5,75 -1467.5,75
  region: -1475,120 -1475,87.5 -1470,82.5 -1417.5,82.5 -1410,90 -1410,120 -1415,125 -1470,125
  region: -1475,172.5 -1475,140 -1470,135 -1415,135 -1410,140 -1410,172.5 -1415,177.5 -1470,177.5
  region: -1475,222.5 -1475,192.5 -1467.5,185 -1417.5,185 -1410,192.5 -1410,222.5 -1415,227.5 -1470,227.5
  region: -1475,280 -1475,237.5 -1412.5,237.5 -1410,240 -1410,280
Drill Drawing:
  text ".Legend" at 2107.5,-1160 h60